# Altium PCB motor_driver.PcbDoc (part 1 of 4)
Units mil, origin at the board's own origin, x right, y up, seen from the top; angles counter-clockwise.
Board outline 2915 x 1500 mil, 2 copper layers (Top Layer, Bottom Layer); 45 components, 39 nets, 213 pads, 173 vias.
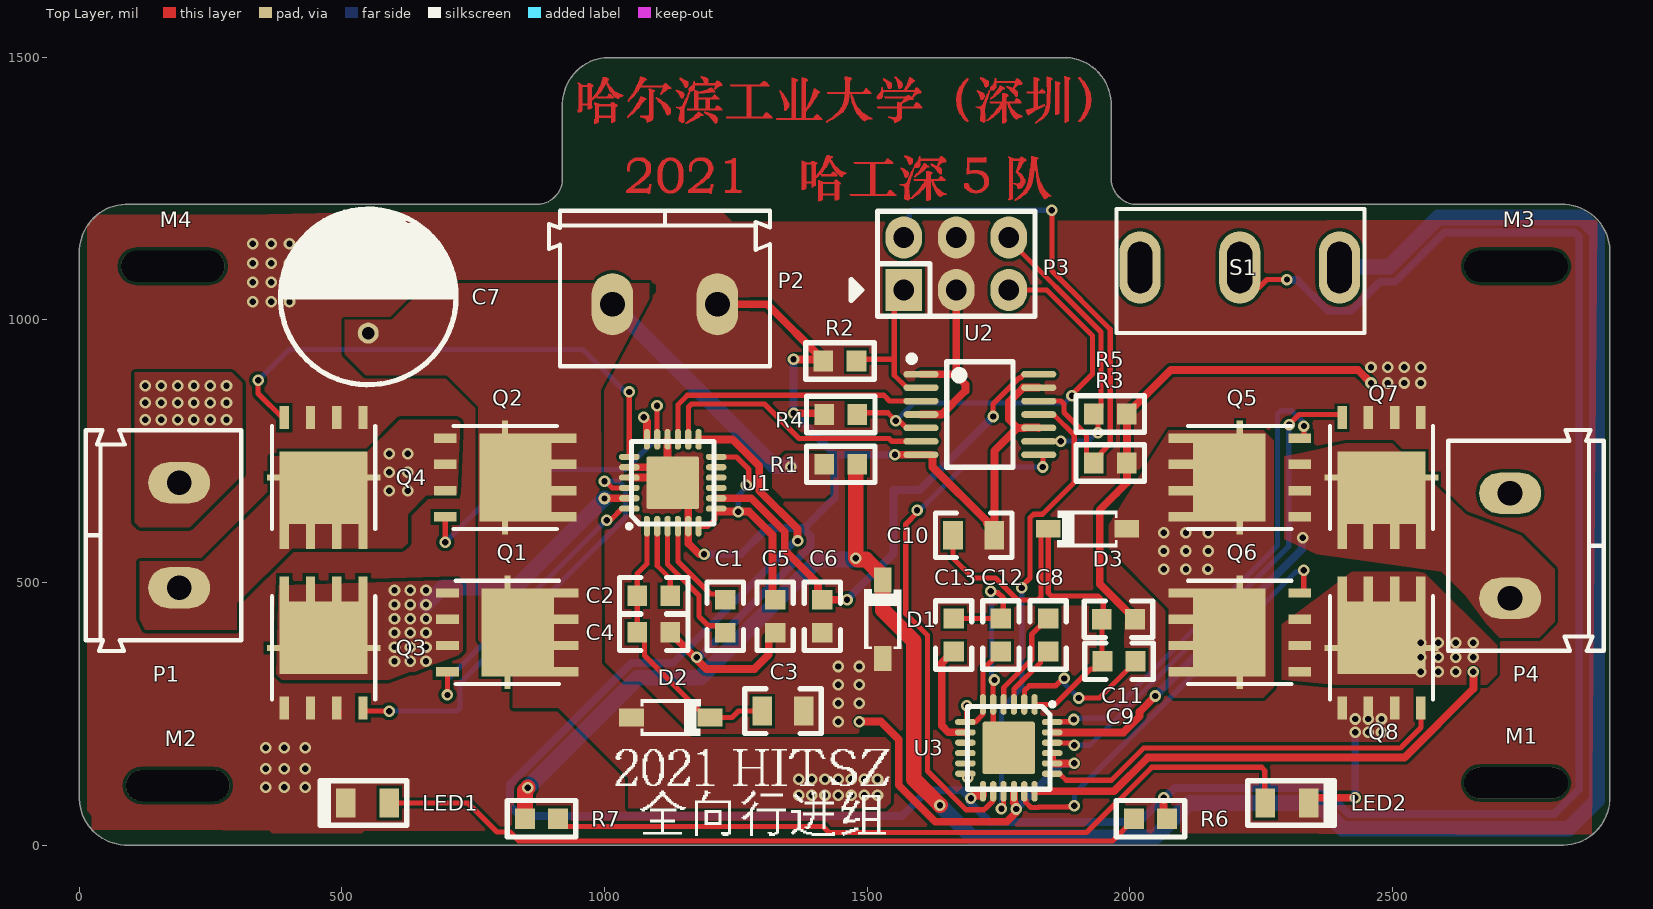
[diagram p0: Top Layer view]
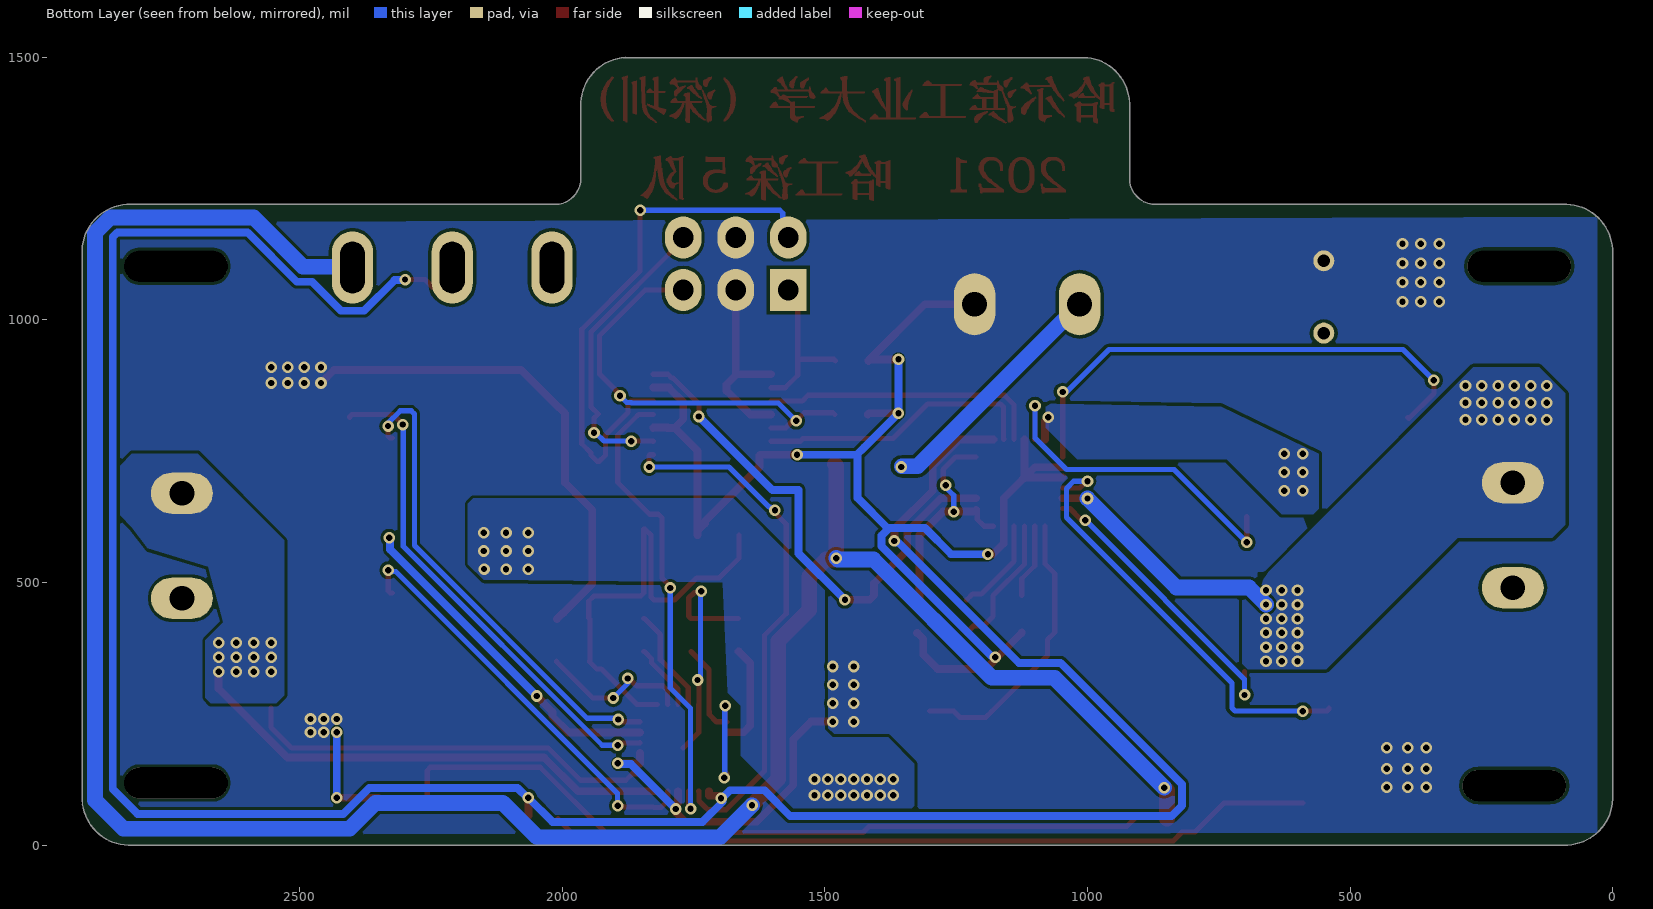
[diagram p1: Bottom Layer view, seen from below]
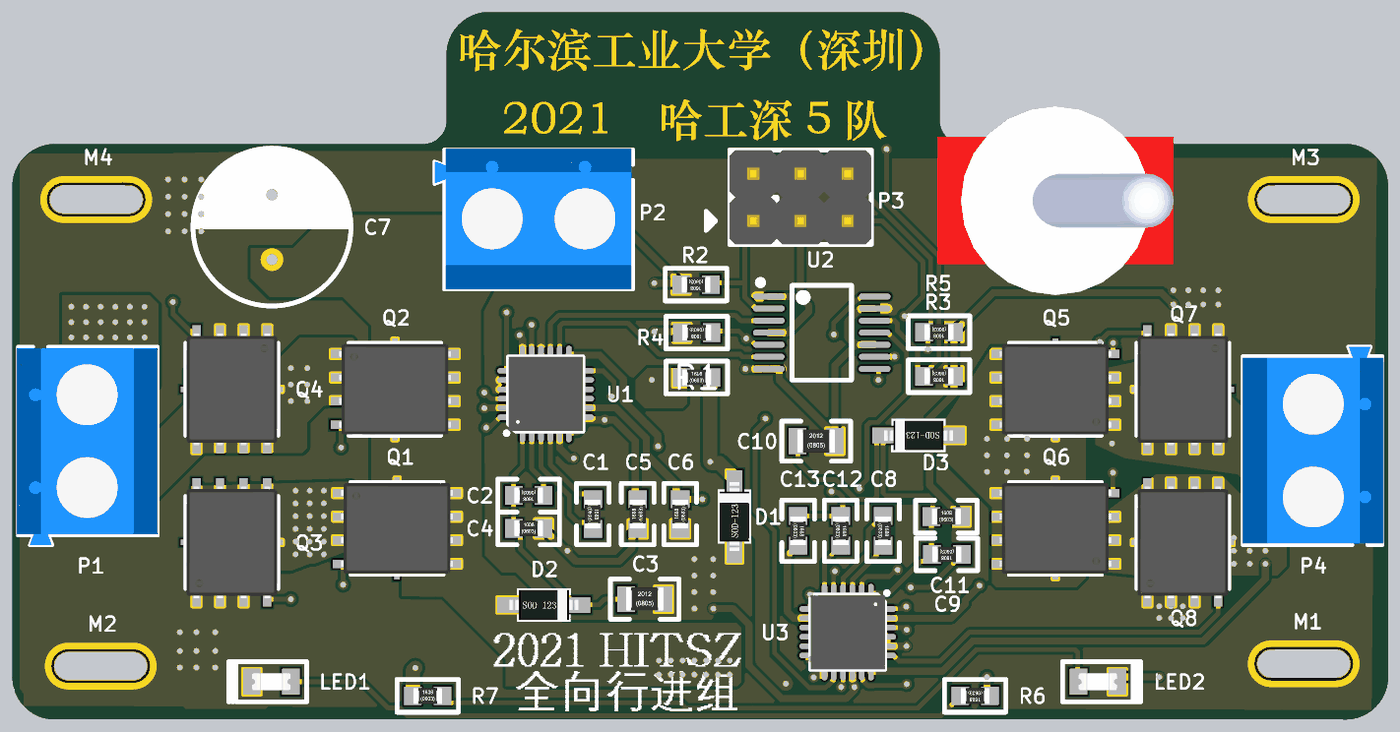
[diagram p5: 3D render of the assembled board from above, using the file's embedded part models]

## Layer stack, top to bottom
Top Solder: solder mask 0.4, Solder Resist, Dk 3.5
Top Layer: signal copper 1.4
Dielectric 1: dielectric 12.6, FR-4, Dk 4.8
Bottom Layer: signal copper 1.4
Bottom Solder: solder mask 0.4, Solder Resist, Dk 3.5

## Board outline
85,0 cw(c90,90) 0,95 0,1135 cw(c90,1130) 95,1220 865,1220 864.48,1220.31 ccw(c870,1270) 920,1270 920,1415 cw(c1010,1410) 1000.05,1499.59 1000,1499.53 1885,1499.53 1880,1500 cw(c1875,1410) 1965,1415 1965,1275 1965.31,1275.52 ccw(c2015,1270) 2015,1220 2830,1220 cw(c2825,1130) 2915,1125 2915,85 cw(c2825,90) 2820,0

## Design rules (kind name [scope] priority, off if disabled: settings)
Clearance [All] p1: gap=6 ignorepadtopadclearanceinfootprint=FALSE
PlaneClearance [All] p1: clearance=8
PlaneConnect [All] p1: planeconnectstyle=Direct reliefexpansion=20 reliefentries=4 reliefconductorwidth=10 reliefairgap=10
PolygonConnect [All] p1: connectstyle=Direct reliefconductorwidth=10 reliefentries=4 polygonreliefangle="90 Angle" airgapwidth=10
RoutingVias [All] p1: holewidth=12 width=22 viastyle="Through Hole" minholewidth=12 minwidth=22 maxholewidth=12 maxwidth=22
SilkToSilkClearance [All] p1: silktosilkclearance=2
SilkToSolderMaskClearance [IsPad] p1: minsilkscreentomaskgap=2 clearancetoexposedcopper=TRUE
SolderMaskExpansion [All] p1: expansion=4 istentingtop=FALSE
Width PWR [InNetClass('PWR')] p1: maxlimit=60 minlimit=15 preferedwidth=15
Width Width_1 [All] p2: maxlimit=10 minlimit=10 preferedwidth=10
26 further rules are at their usual default settings.

## Components (designator, comment, footprint, x,y, rotation, side; value= is the part's Value field where it differs from the comment)
C1 "100nF" C0603 1230,435.55 r270 top locked
C2 "1uF" C0603 1093.83,475 r180 top locked
C3 "10uF" C0805 1340,255 r0 top locked
C4 "100nF" C0603 1093.83,405 r0 top locked
C5 "1uF" C0603 1325,435.55 r90 top locked
C6 "1uF" C0603 1415,435.55 r90 top locked
C7 "220uF 25V" RB.2/.4 550,1043.9 r0 top locked
C8 "100nF" C0603 1845,400 r270 top locked
C9 "1uF" C0603 1980,350 r180 top locked
C10 "10uF" C0805 1703.19,590 r0 top locked
C11 "100nF" C0603 1978.94,430 r0 top locked
C12 "1uF" C0603 1755,400 r270 top locked
C13 "1uF" C0603 1665,400 r270 top locked
D1 "BZT52C3V3" SOD-123_1 1530,430 r90 top locked
D2 "1N5819" SOD-123_1 1126.06,242.91 r0 top locked
D3 "1N5819" SOD-123_1 1920,602.09 r180 top locked
LED1 "LED" LED-0805 548.66,80 r180 top locked
LED2 "LED" LED-0805 2300,80 r0 top locked
M1 "MountHole" MountHole 2736.22,118.11 r0 top locked
M2 "MountHole" MountHole 187.17,113.11 r180 top locked
M3 "MountHole" MountHole 2736.22,1102.36 r180 top locked
M4 "MountHole" MountHole 177.64,1102.36 r180 top locked
P1 "接口_1" "KF/WJ/DG 301-2p-5.0mm" 190,590 r90 top locked
P2 "接口" "KF/WJ/DG 301-2p-5.0mm" 1115,1030 r0 top locked
P3 "Header 3X2" PIN-2x3-2.54-1.0 1670,1107.15 r0 top locked
P4 "接口_1" "KF/WJ/DG 301-2p-5.0mm" 2725,570 r270 top locked
Q1 "TPH1R403NL" DFN5x6 815,405 r270 top locked
Q2 "TPH1R403NL" DFN5x6 810.67,700 r270 top locked
Q3 "TPH1R403NL" DFN5x6 465,375.31 r0 top locked
Q4 "TPH1R403NL" DFN5x6 465,700 r180 top locked
Q5 "TPH1R403NL" DFN5x6 2210,700 r90 top locked
Q6 "TPH1R403NL" DFN5x6 2210,405 r90 top locked
Q7 "TPH1R403NL" DFN5x6 2480,700 r180 top locked
Q8 "TPH1R403NL" DFN5x6 2480,375.31 r0 top locked
R1 "2.2K" 0603 1450,725 r0 top locked
R2 "10K" 0603 1448.5,921.96 r180 top locked
R3 "10K" 0603 1963.5,727.71 r180 top locked
R4 "10K" 0603 1450,820 r180 top locked
R5 "10K" 0603 1963.5,820.98 r180 top locked
R6 "330R" 0603 2040,50 r180 top locked
R7 "1K" 0603 880,50 r0 top locked
S1 "SWITCH" "ToggleSwitch 7102" 2210,1100 r0 top locked
U1 "DRV8701E" QFN24-4x4 1130,690 r90 top locked
U2 "SN74HC125PWR" TSSOP-14 1715,820 r270 top locked
U3 "DRV8701E" QFN24-4x4 1770,185 r270 top locked

## Footprints (in the part's own frame and the unit in brackets; to place one, negate y for a bottom-side part, rotate by r counter-clockwise, add the part's x,y. Pads: shape width x height; smd on the part's side, far side on the other; paste and mask are expansions set on the pad)
0603 [mm] "SMD, 0603"
  rect 0.95x1 smd: 1(-0.8,0) 2(0.8,0)
  silkscreen extent -1.66,-0.88 1.66,0.88, body extent -0.77,-0.43 0.77,0.43, height 0.45
C0603 [mm] "SMD, 0603"
  rect 0.95x1 smd: 1(-0.8,0) 2(0.8,0)
  silkscreen extent -1.66,-0.88 1.66,0.88, body extent -0.77,-0.43 0.77,0.43, height 0.45
C0805 [mm] "SMD, 0805"
  rect 0.95x1.4 smd: 1(-1,0) 2(1,0)
  silkscreen extent -1.85,-1.08 1.85,1.08, body extent -1,-0.62 1,0.63, height 0.45
DFN5x6 [mm]
  rect 0.45x1.6 smd: 1(-1.905,2.65) 1(-0.635,2.65) 1(0.635,2.65) 1(1.905,2.65)
  rect 5.5x0.3 smd: 1(0,0)
  rect 4.25x3.5 smd: 1(0,0.5)
  rect 0.45x1.1 smd: 2(1.905,-2.9) 3(-1.905,-2.9) 3(-0.635,-2.9) 3(0.635,-2.9)
  silkscreen extent -2.5,-2.5 2.5,2.5, body extent -2.45,-3 2.45,3, height 1
"KF/WJ/DG 301-2p-5.0mm" [mm] "2P 5.08mm间距 接线端子"
  oval 2x3 hole 1.2: 1(2.54,0) 2(-2.54,0)
  silkscreen extent -5.6,-3 5.08,4.52, body extent -5.6,-3 5,4.6, height 10
LED-0805 [mm] "LED, SMD, 0805"
  rect 0.95x1.4 smd: 1(-1.05,0) 2(1.05,0)
  silkscreen extent -1.9,-1.08 2.3,1.08, body extent -1.03,-0.46 1.03,0.45, height 0.85
MountHole [mm]
  oval 5x1.5 hole 1.5 slot 5 at 0 deg mask+0.508: 1(0,0)
PIN-2x3-2.54-1.0 [mil] "Pin Header"
  rect 70x80 hole 39.37: 1(-100,-50)
  oval 70x80 hole 39.37: 2(-100,50) 3(0,-50) 4(0,50) 5(100,-50) 6(100,50)
  silkscreen extent -200,-100 150,100, body extent -150,-100 150,100, height 398
QFN24-4x4 [mm]
  rrect10% 2.55x2.55 smd: 0(0,0)
  oval 1x0.3 smd: 1(-2.1,1.25) 2(-2.1,0.75) 3(-2.1,0.25) 4(-2.1,-0.25) 5(-2.1,-0.75) 6(-2.1,-1.25) 13(2.1,-1.25) 14(2.1,-0.75) 15(2.1,-0.25) 16(2.1,0.25) 17(2.1,0.75) 18(2.1,1.25)
  oval 0.3x1 smd: 7(-1.25,-2.1) 8(-0.75,-2.1) 9(-0.25,-2.1) 10(0.25,-2.1) 11(0.75,-2.1) 12(1.25,-2.1) 19(1.25,2.1) 20(0.75,2.1) 21(0.25,2.1) 22(-0.25,2.1) 23(-0.75,2.1) 24(-1.25,2.1)
  silkscreen extent -2.21,-2 2,2.21, body extent -2,-2 2,2, height 0.9
RB.2/.4 [mil]
  round 40 hole 23.62: 1(0,-68.9) 2(0,68.9)
  silkscreen extent -167,-167 167,167
SOD-123_1 [mm]
  rect 1.2x0.85 smd: 1(-1.9,0) 2(1.9,0)
  silkscreen extent -1.45,-0.9 1.47,0.9, body extent -1.85,-0.8 1.85,0.8, height 1.2
"ToggleSwitch 7102" [mm]
  oval 2x3.5 hole 1.2 slot 2.5 at 90 deg: 1(-4.826,0) 2(0,0) 3(4.826,0)
  silkscreen extent -5.97,-3.17 6.03,2.83, body extent -6.35,-5.08 6.36,5.08, height 28.7
TSSOP-14 [mm]
  oval 0.32x1.7 smd: 1(-1.95,-2.85) 2(-1.3,-2.85) 3(-0.65,-2.85) 4(0,-2.85) 5(0.65,-2.85) 6(1.3,-2.85) 7(1.95,-2.85) 8(1.95,2.85) 9(1.3,2.85) 10(0.65,2.85) 11(0,2.85) 12(-0.65,2.85) 13(-1.3,2.85) 14(-1.95,2.85)
  silkscreen extent -2.85,-3.45 2.55,1.6

## Part data
C1 C2 C3 C4 C5 C6 C8 C9 C10 C11 C12 C13: library part CAP, "电容"
C7: library part CAP_2
Q1 Q2 Q3 Q4 Q5 Q6 Q7 Q8: "MOSFET"
R1 R2 R3 R4 R5 R6 R7: library part RES, "电阻"
U2: "IC"

## Via types
v1: diameter 22, hole 12, Top Layer to Bottom Layer, tented both sides, 173 vias

## Nets (pads, with @x,y where several pads share a name; then routed paths per layer and width w, separated by ;. In a path a pad name is that pad's centre, name@x,y a point inside that pad or via, vN(x,y) a via of type N, cw(c..) or ccw(c..) an arc to the next point about the centre after c; other vN are vias at no path point)
3V3: D1.2 R1.2 R7.1 S1.3 | length 4562.9
  Top Layer w30: R7.1@848.5,50 848.5,103.86 v1(853.95,109.31) ; v1(1478.6,546.46) 1478.6,722.1 R1.2@1481.5,725 ; v1@1481.37,546.46 1481.37,543.69 1498,543.69 1530,511.69 1530,447.78 1589.08,388.7 1589.08,125.9 1638.9,76.08 v1(1638.9,75.71)
  Bottom Layer w30: v1(853.95,109.31) 1063.07,318.42 1182.16,318.42 1407.44,543.69 1475.83,543.69 v1(1478.6,546.46) ; v1(1638.9,75.71) 1699.92,14.69 2048.15,14.69 2113.69,80.22 2356.24,80.22 2405.72,30.74 2836.04,30.74 2890.59,85.29 2890.59,1165.96 2861.18,1195.37 2588.16,1195.37 2494.15,1101.37 2401.37,1101.37 S1.3@2400,1100
DVDD: C6.2 U1.8 U2.14 | length 982.9
  Top Layer w10: v1@1740,825 1740,839.89 1789.79,889.68 1792.25,889.68 1799.34,896.77 U2.14@1827.2,896.77
  Top Layer w15: U1.8@1212.68,660.47 1279.54,660.5 1343.41,596.63 1343.41,561.69 1406.42,498.68 1406.42,475.62 C6.2@1415,467.05 v1(1462.05,467.05)
  Bottom Layer w15: v1(1462.05,467.05) 1550.31,555.31 1550.31,676.01 1600.35,676.01 v1(1740.53,816.19)
GND: C3.2 C4.2 C5.1 C6.1 C7.2 C10.2 C11.2 D1.1 LED1.2 LED2.2 P2.1 P3.3 P3.4 Q3.3 Q4.3 Q7.3 Q8.3 R2.2 R3.1 R4.2 R5.1 U1.0 U1.5 U1.16 U1.20 U1.21 U2.1 U2.4 U2.7 U2.10 U2.13 U3.16 U3.20 U3.21 | length 4996.3
  Top Layer w15: U1.21@1047.32,699.84 U1.0@1120.16,699.84 ; U1.20@1047.32,719.53 1100.47,719.53 U1.0@1120.16,699.84 ; U1.16@1120.16,772.68 U1.0@1120.16,699.84 ; C4.2@1125.33,405 1125.33,404.02 1171.86,357.49 v1(1175.97,357.49) ; v1@1173.02,356.32 1193.95,335.4 1285.4,335.4 1312.85,362.85 1312.85,392.85 1324.06,404.06 C5.1@1325,404.06 ; v1(1189.61,553.69) 1180.42,553.69 1159.53,574.59 U1.5@1159.53,607.32 1159.53,660.47 U1.0@1130,690 U1.0@1120.16,699.84 ; P2.1@1215,1030 1309.95,1030 1417.01,922.94 R2.2@1417.01,921.96 1413.97,925 v1(1360,925) ; v1(1360.11,822.31) 1416.2,822.31 R4.2@1418.5,820 ; v1(1485,235) 1526.5,235 1560.58,200.92 1560.58,113.72 1629.93,44.37 1766.28,44.37 1784.13,62.22 v1(1784.13,68.6) ; v1(1553.23,743.23) U2.7@1602.8,743.23 1623.76,743.23 1624.96,742.03 1624.96,720.04 1728.86,616.14 1728.86,612.56 1738.98,602.44 C10.2@1742.56,602.44 ; U2.4@1602.8,820 1642.33,820 1687.29,864.97 1687.29,877.39 1670,894.69 ; U2.1@1602.8,896.77 1667.92,896.77 1670,894.69 ; P3.3@1670,1057.15 1670,894.69 ; C10.2@1742.56,590 1742.56,750.65 1786.31,794.41 U2.10@1800.04,794.41 ; U3.16@1779.84,102.32 1780.12,102.04 1780.12,80.51 1781.37,79.25 1781.37,78.58 1782.53,77.42 1782.53,72.1 v1@1783,71.63 ; 1785.95,794.91 1770,810.86 1770,843.72 1797.46,871.18 U2.13@1827.2,871.18 ; U2.10@1800.04,794.91 1826.71,794.91 U2.10@1827.2,794.41 ; U3.21@1852.68,175.16 U3.20@1852.68,155.47 v1(1894.53,155.47) ; C11.2@2010.43,430 2010.43,430.98 1999.23,442.19 1998.25,442.19 1943.37,497.06 1943.37,638.37 1975,670 1995,690 R3.1@1995,727.71 R5.1@1995,820.98 1995,821.96 2006.2,833.16 2007.19,833.16 2079.02,905 2435,905 v1(2460,880) ; LED2.2@2341.34,80 2351.34,90 v1(2430,90)
  Bottom Layer w15: v1(1175.97,357.49) 1178.11,359.62 1183.06,359.62 1392.41,568.97 1392.41,589.27 1378.05,603.62 1309.58,603.62 1259.65,553.69 v1(1189.61,553.69) ; P2.1@1215,1010 P2.1@1215,1030 ; v1(1360,925) 1360,822.42 v1(1360.11,822.31) 1360.2,822.31 1424.43,758.08 1439.28,743.23 v1(1553.23,743.23) ; 1379.34,602.33 1437.89,660.87 1437.89,744.62 ; P3.3@1670,1052.15 P3.3@1670,1057.15 ; v1(1784.13,68.6) 1784.18,68.6 1784.26,68.61 1869.78,154.13 1893.19,154.13 v1(1894.53,155.47) ; v1(2430,90) v1(2430,215)
  other v1: 355,110 390,110 430,110 355,145 390,145 430,145 355,185 390,185 430,185 2455,215 2480,215 1445,235 2430,240 2455,240 2480,240 1445,270 1485,270 1445,305 1485,305 1445,340 1485,340 2491.67,880 2523.33,880 2555,880 2460,910 2491.67,910 2523.33,910 2555,910 330,1035 365,1035 400,1035 330,1071.67 365,1071.67 400,1071.67 330,1108.33 365,1108.33 400,1108.33 330,1145 365,1145 400,1145
"L A": P1.1 Q1.3 Q3.1 U1.23 | length 471.2
  Top Layer w15: v1@996.5,660 v1@996.97,660.47 ; v1@1000.47,660.47 U1.23@1047.32,660.47
  Bottom Layer w30: v1(660,458) 692.42,490.42 830.42,490.42 v1(1000,660)
  other v1: 600,350 630,350 660,350 600,377 630,377 660,377 600,404 630,404 660,404 600,431 630,431 660,431 600,458 630,458 600,485 630,485 660,485 125,810 156,810 187,810 218,810 249,810 280,810 125,842.5 156,842.5 187,842.5 218,842.5 249,842.5 280,842.5 125,875 156,875 187,875 218,875 249,875 280,875
"L B": P1.2 Q2.3 Q4.1 U1.18 | length 44.8
  Top Layer w15: v1(1074.8,815) 1074.8,813.11 1080.79,807.12 U1.18@1080.79,772.68
  other v1: 590,675 625,675 590,710 625,710 590,745 625,745
"L EN": U1.14 U2.6 | length 536.4
  Top Layer w10: U1.14@1159.53,772.68 1159.87,773.02 1159.87,794.57 1160,794.69 1160,834.14 1165.86,840 1305,840 1370.48,774.52 1541.92,774.52 1547.62,768.82 U2.6@1602.8,768.82
"L EN IN": P3.5 R4.1 U2.5 | length 816.5
  Top Layer w10: R4.1@1481.5,820 1484.7,823.21 1539.43,823.21 v1(1554.8,807.84) 1557.09,805.55 1563.79,805.55 1574.93,794.41 U2.5@1602.8,794.41 ; P3.5@1770,1057.15 1842.5,1057.15 1929.64,970.01 1929.64,897.32 1890.45,858.13 v1(1890.45,855.45)
  Bottom Layer w10: v1(1554.8,807.84) 1588.98,842.03 1868.54,842.03 1869.22,842.7 1877.7,842.7 v1(1890.45,855.45)
"L PH": U1.15 U2.3 | length 541
  Top Layer w10: U1.15@1139.84,772.68 1139.84,838.68 1157.77,856.61 1532.14,856.61 1543.16,845.59 U2.3@1602.8,845.59
"L PH IN": P3.1 R2.1 U2.2 | length 300.1
  Top Layer w10: R2.1@1480,921.96 1483.46,925.42 1548.34,925.42 ; P3.1@1570,1057.15 1552.02,1039.17 1552.02,894.79 1575.63,871.18 U2.2@1602.8,871.18
NetC1_1: C1.1 U1.4 | length 187.6
  Top Layer w10: U1.4@1139.84,607.32 1139.84,540.16 1201.68,478.32 1218.72,478.32 C1.1@1230,467.05
NetC1_2: C1.2 U1.3 | length 259.9
  Top Layer w10: U1.3@1120.16,607.32 1120.16,534.84 1180,475 1180,435 1197.24,417.76 1216.3,417.76 C1.2@1230,404.06
NetC2_1: C2.1 U1.2 | length 142.6
  Top Layer w10: U1.2@1100.47,607.32 1100.47,531.9 1125.33,507.04 C2.1@1125.33,475
NetC2_2: C2.2 C3.1 C4.1 D2.2 U1.1 | length 538.2
  Top Layer w10: U1.1@1080.79,607.32 1080.79,535.79 1062.34,517.34 C2.2@1062.34,475 C4.1@1062.34,405 1076.04,391.3 1076.04,360.85 1182.24,254.65 1193.98,242.91 1242.91,242.91 1255,255 C3.1@1300.63,255
NetC5_2: C5.2 U1.6 U1.7 U1.12 | length 472
  Top Layer w10: U1.6@1179.21,607.32 1197.32,607.32 1210,620 U1.7@1210,639.95 ; U1.7@1212.68,640.79 U1.7@1218.46,635 ; U1.12@1212.68,739.21 1251.17,739.21 1275,715.39 1275,689.77 v1(1270.23,685)
  Top Layer w15: U1.7@1218.46,635 v1@1256.58,635 ; v1(1255,635) 1275.34,635 1298.24,612.1 1320,590.34 1320,472.05 C5.2@1325,467.05
  Bottom Layer w10: v1(1255,635) 1255,666.25 1270.23,681.48 v1(1270.23,685)
NetC8_1: C8.1 U3.4 | length 199.5
  Top Layer w10: U3.4@1760.16,267.68 1760.5,268.02 1760.5,299.85 1813.6,352.95 1813.6,401.08 1844.02,431.5 C8.1@1845,431.5
NetC8_2: C8.2 U3.3 | length 128.4
  Top Layer w10: U3.3@1779.84,267.68 1780.19,268.02 1780.19,296.91 1830.31,347.04 1830.31,354.8 1844.02,368.5 C8.2@1845,368.5
NetC9_1: C9.1 U3.2 | length 298.2
  Top Layer w10: U3.2@1799.53,267.68 1799.87,268.02 1799.87,293.97 1809.07,303.16 1858.88,303.16 1872.91,317.2 v1(1875.59,317.2) ; v1(1903.4,280) 1942.48,280 2011.5,349.02 C9.1@2011.5,350
  Bottom Layer w10: v1(1875.59,317.2) 1875.59,307.8 v1(1903.4,280)
NetC9_2: C9.2 C10.1 C11.1 D3.2 U3.1 | length 896.3
  Top Layer w10: C10.1@1663.82,590 1663.82,546.18 1701.66,508.34 1744.94,508.34 1786.65,466.63 1825.63,466.63 1831.49,472.49 1831.49,590.35 1843.22,602.09 D3.2@1845.2,602.09 1845.2,480.25 1851.05,474.39 1939.88,474.39 1950,464.27 1950,432.56 C11.1@1947.44,430 1947.44,351.06 C9.2@1948.5,350 1948.5,349.02 1934.8,335.31 1925.48,335.31 1857.84,267.68 U3.1@1819.21,267.68
NetC12_1: C12.1 C13.1 U3.0 U3.5 | length 475.1
  Top Layer w10: C13.1@1665,431.5 1754.02,431.5 C12.1@1755,431.5 1759.68,436.17 1759.68,470.26 1748.81,481.13 1737.89,481.13 v1(1735.59,483.43) ; v1(1742.79,314.24) 1740.13,311.58 1740.13,268.02 U3.5@1740.47,267.68 1740.47,214.53 U3.0@1770,185
  Bottom Layer w10: v1(1735.59,483.43) 1737.37,481.65 1737.37,319.66 v1(1742.79,314.24)
NetC12_2: C12.2 U3.6 U3.7 U3.12 | length 354.7
  Top Layer w10: U3.12@1687.32,135.79 1689.16,135.79 1689.58,135.37 1689.58,130.36 v1(1691.83,128.1) ; v1(1690,265) 1690.07,264.93 1690.07,235.05 1689.23,234.21 U3.7@1687.32,234.21 1687.67,234.56 1706.55,234.56 1720.44,248.45 1720.44,254.04 1720.79,254.39 1720.79,334.29 C12.2@1755,368.5
  Bottom Layer w10: v1(1690,265) 1690.92,264.08 1690.92,129.02 v1(1691.83,128.1)
NetC13_2: C13.2 U3.8 | length 201.4
  Top Layer w15: C13.2@1665,368.5 1664.02,368.5 1642.26,346.75 1642.26,227.52 1654.98,214.81 1687.04,214.81 U3.8@1687.32,214.53
NetLED1_1: LED1.1 R6.2 | length 1466.4
  Top Layer w10: LED1.1@590,80 740.13,80 795.53,24.6 819.96,24.6 836.72,7.84 1967.33,7.84 2008.5,49.02 R6.2@2008.5,50
NetLED2_1: LED2.1 R7.2 | length 1473.9
  Top Layer w10: R7.2@911.5,50 911.5,49.02 925.2,35.31 1416,35.31 1427.47,23.84 1918.27,23.84 2042.35,147.92 2251.85,147.92 2257.7,142.06 2257.7,80.96 LED2.1@2258.66,80
NetQ1_2: Q1.2 U1.24 | length 555.1
  Top Layer w10: v1(700.83,285.83) Q1.2@700.83,330 ; v1(1004.04,618.79) 1006.34,621.08 1013.84,621.08 1033.54,640.79 U1.24@1047.32,640.79
  Bottom Layer w10: v1(700.83,285.83) 700.83,315.57 v1(1004.04,618.79)
NetQ2_2: Q2.2 U1.17 | length 660.4
  Top Layer w10: v1(696.5,576.5) Q2.2@696.5,625 ; v1(1100,836.82) 1100,773.15 U1.17@1100.47,772.68
  Bottom Layer w10: v1(696.5,576.5) 835,715 1040,715 1100,775 v1(1100,836.82)
NetQ3_2: Q3.2 U1.22 | length 838.5
  Top Layer w10: Q3.2@540,261.14 540,258.86 543.86,255 v1(590,255) ; v1(1000,693) 1002,693 1014.84,680.16 U1.22@1047.32,680.16
  Bottom Layer w10: v1(590,255) 719.14,255 725,260.86 725,308.63 1040,623.63 1040,679.14 1026.14,693 v1(1000,693)
NetQ4_2: Q4.2 U1.19 | length 984.1
  Top Layer w10: v1(340.24,885.09) 340.24,859.94 388,812.18 Q4.2@390,814.17 ; v1(1047.11,862.99) 1047.32,862.77 U1.19@1047.32,739.21
  Bottom Layer w10: v1(340.24,885.09) 398.96,943.81 959.18,943.81 1040,862.99 v1(1047.11,862.99)
NetQ5_2: Q5.2 U3.24 | length 916.3
  Top Layer w10: U3.24@1852.68,234.21 1853.02,234.56 1886.13,234.56 1890.6,239.03 v1(1893.84,239.03) ; Q5.2@2324.17,775 2328.44,775 2332.3,778.86 v1(2332.3,798)
  Bottom Layer w10: v1(1893.84,239.03) 1896.14,241.32 1953.06,241.32 2282.12,570.39 2282.12,821.14 2287.98,827 2309.11,827 2332.3,803.81 v1(2332.3,798)
NetQ6_2: Q6.2 U3.17 | length 804.8
  Top Layer w10: U3.17@1799.53,102.32 1799.53,88.05 1802.31,85.27 1802.31,81.54 1812.21,71.64 1826.22,71.64 1826.73,72.15 1883.67,72.15 1884.22,72.7 1892.7,72.7 v1(1895,75) ; Q6.2@2324.17,480 2327.89,480 2331.75,483.86 v1(2331.75,523.25)
  Bottom Layer w10: v1(1895,75) 1895,98.41 2317.54,520.95 2329.46,520.95 v1(2331.75,523.25)
NetQ7_2: Q7.2 U3.22 | length 954.2
  Top Layer w10: U3.22@1852.68,194.84 1853.02,194.5 1887.13,194.5 1891.6,190.03 v1(1894.84,190.03) ; v1(2304.12,800.88) v1(2304.12,800.88) 2323.19,820 2401.14,820 2405,816.14 Q7.2@2405,814.17
  Bottom Layer w10: v1(1894.84,190.03) 1924.39,190.03 2303.1,568.74 2303.1,799.85 v1(2304.12,800.88)
NetQ8_2: Q8.2 U3.19 | length 786.5
  Top Layer w10: U3.19@1852.68,135.79 1866.95,135.79 1879.41,123.32 1965.43,123.32 2027.03,184.92 2516.17,184.92 2555,223.75 Q8.2@2555,261.14
nSLEEP: R6.1 S1.2 U1.13 U3.13 | length 5130.3
  Top Layer w10: R6.1@2065,56.5 R6.1@2071.5,50 ; S1.2@2210,1100 2247.47,1062.53 2261.99,1077.05 v1(2299.89,1077.05)
  Top Layer w15: U1.13@1179.21,772.68 1243.87,772.68 1294.73,721.82 1294.73,675.01 1367.91,601.83 v1(1367.91,579.12) ; v1(1697.91,89.19) 1702.45,93.74 1719.95,93.74 1720.79,94.57 U3.13@1720.79,102.32 ; R6.1@2065,56.5 v1(2065,90)
  Bottom Layer w15: v1(1367.91,579.12) 1366.01,579.12 1362.51,575.62 1359.46,575.62 1130.76,346.92 1051.27,346.92 820,115.66 820,75 840,55 860,55 1566.19,55 1615.39,104.21 1681.08,104.21 1696.1,89.19 v1(1697.91,89.19) ; v1@1694.81,82.58 1733.29,44.1 2019.1,44.1 v1(2065,90) ; v1@2067.29,90.39 2085.61,108.72 2368.05,108.72 2417.53,59.24 2809.24,59.24 2856.56,106.56 2856.56,1158.08 2847.77,1166.87 2599.96,1166.87 2505.96,1072.87 2477.17,1072.87 2421.9,1017.6 2378.1,1017.6 2319.76,1075.94 2300.99,1075.94 v1(2299.89,1077.05)
"R A": P4.1 Q5.3 Q7.1 U3.23 | length 647.7
  Top Layer w15: U3.23@1852.68,214.53 1988.39,214.53 2019.31,245.46 2019.31,253.84 v1(2049.26,283.78)
  Bottom Layer w15: v1(2049.26,283.78) 2328.66,563.19 2328.66,583.66 v1(2330,585)
"R B": P4.2 Q6.3 Q8.1 U3.18 | length 949.1
  Top Layer w15: U3.18@1819.21,102.32 1970.59,102.32 2034.69,166.42 2523.83,166.42 2655,297.59 v1(2655,330)
  other v1: 2555,330 2588.33,330 2621.67,330 2555,357.5 2588.33,357.5 2621.67,357.5 2655,357.5 2555,385 2588.33,385 2621.67,385 2655,385
"R EN": U2.8 U3.14 | length 1007.8
  Top Layer w10: v1(1595.42,637.81) 1595.42,632.86 1573.96,611.39 1573.96,440.59 1615.08,399.47 1615.08,140.91 1688.8,67.19 1723.03,67.19 1727.47,71.64 1727.79,71.64 1740.13,83.97 1740.13,101.98 U3.14@1740.47,102.32 ; U2.8@1827.2,743.23 1833.8,743.23 1835,742.03 v1(1835,720)
  Bottom Layer w10: v1(1595.42,637.81) 1598.67,637.81 1604.48,643.62 1606.39,643.62 1682.77,720 v1(1835,720)
"R PH": U2.11 U3.15 | length 898
  Top Layer w10: v1(1756.13,68.87) 1756.13,72.25 1756.09,72.3 1759.81,76.02 1759.81,101.98 U3.15@1760.16,102.32 ; v1(1794.79,489.61) 1794.79,492.85 1810.57,508.64 1810.57,623.38 1817.02,629.82 1833.81,629.82 1894.72,690.73 1894.72,780.71 1856.73,818.7 1856.37,818.7 1855.07,820 U2.11@1827.2,820
  Bottom Layer w10: v1(1756.13,68.87) 1756.13,260.56 1794.79,299.22 v1(1794.79,489.61)
R_EN_IN: P3.6 R5.2 U2.9 | length 573.4
  Top Layer w10: P3.6@1770,1157.15 1770,1152.75 1945.64,977.11 1945.64,834.61 R5.2@1932.01,820.98 1940,812.99 v1(1940,785) ; U2.9@1827.2,768.82 1827.7,769.32 v1(1869.32,769.32)
  Bottom Layer w10: v1(1869.32,769.32) 1921.07,769.32 1936.75,785 v1(1940,785)
R_PH_IN: P3.2 R3.2 U2.12 | length 1047.2
  Top Layer w10: U2.12@1827.2,845.59 1869.2,845.59 1875.06,839.73 1875.06,823.99 1918.31,780.74 1918.31,742.39 1930.27,730.43 1933.75,730.43 1945.71,742.39 1945.71,746.86 1963.23,764.38 1963.23,982.15 1852.15,1093.23 v1(1852.15,1209.07)
  Bottom Layer w10: P3.2@1570,1157.15 1580.57,1167.72 1580.57,1203.21 1586.43,1209.07 v1(1852.15,1209.07)
VM: C7.1 D2.1 D3.1 P2.2 Q1.1 Q2.1 Q5.1 Q6.1 R1.1 | length 469.8
  Bottom Layer w15: P2.2@1015,1030 1015,1027.56 1044.44,998.12 P2.2@1046.88,998.12 ; v1@1353.66,721.34 v1(1355,720)
  Bottom Layer w30: P2.2@1046.88,998.12 1323.66,721.34 v1@1353.66,721.34
  other v1: 1370,95 1395,95 1420,95 1445,95 1470,95 1495,95 1520,95 1370,125 1395,125 1420,125 1445,125 1470,125 1495,125 1520,125 2065,525 2107.5,525 2149.35,525.65 2065,560 2107.5,560 2150,560 2065,595 2107.5,595 2150,595
pads on no net: M1.1 M2.1 M3.1 M4.1 S1.1 U1.9 U1.10 U1.11 U3.9 U3.10 U3.11
copper on no net: | length 31629.1